# Altium PCB pcbEDMC.PcbDoc
Units mil, origin at the board's own origin, x right, y up, seen from the top; angles counter-clockwise.
Board outline 9233.65 x 5593.65 mil, 2 copper layers (Top Layer, Bottom Layer); 78 components, 77 nets, 327 pads, 0 vias.
Unrouted connection lines stored in the file: 3.
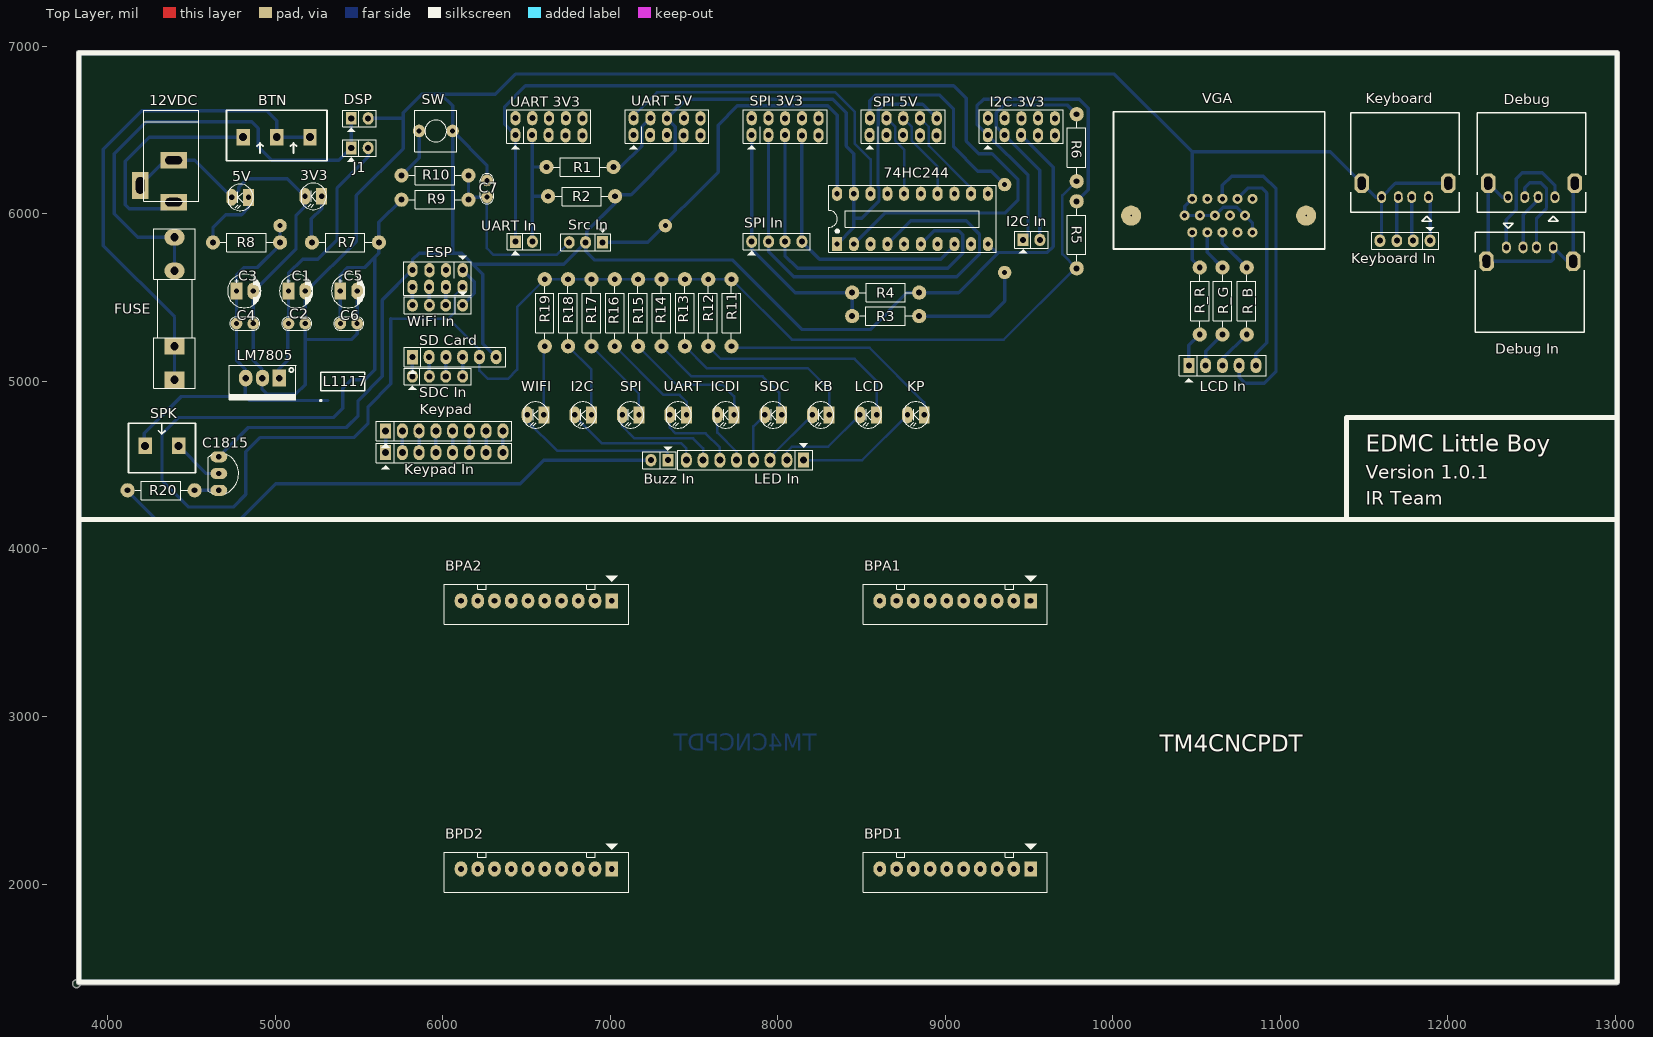
[diagram p0: Top Layer view]
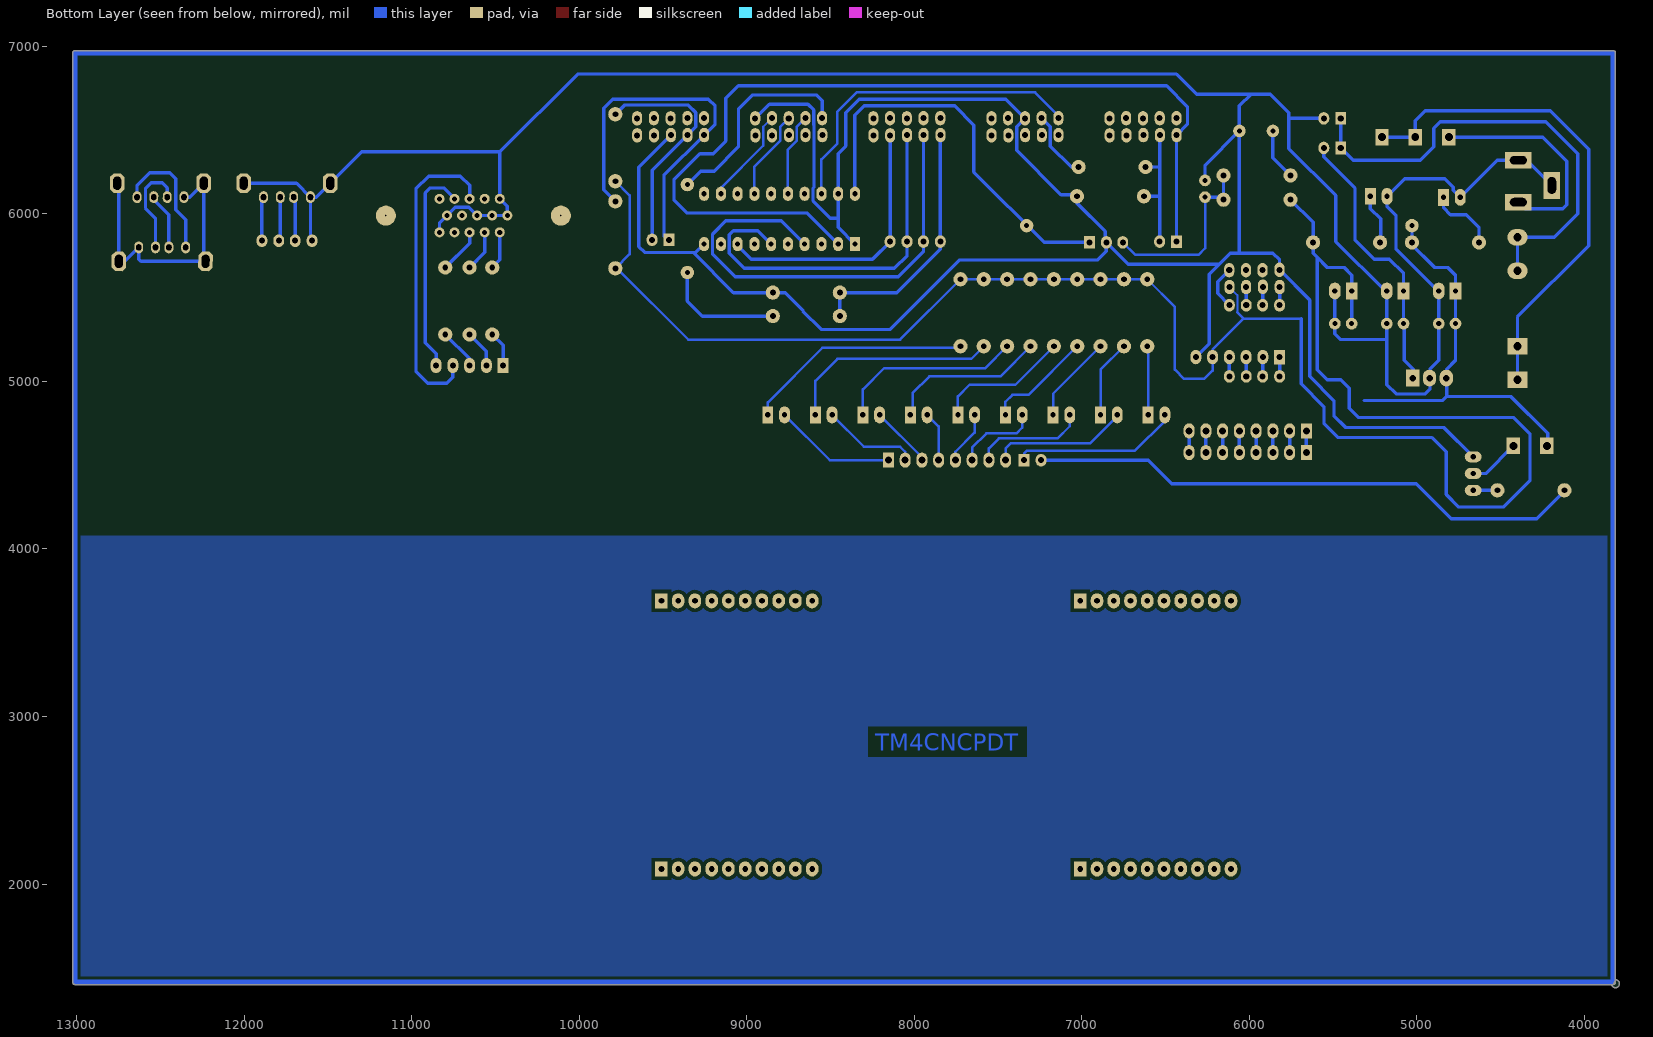
[diagram p1: Bottom Layer view, seen from below]
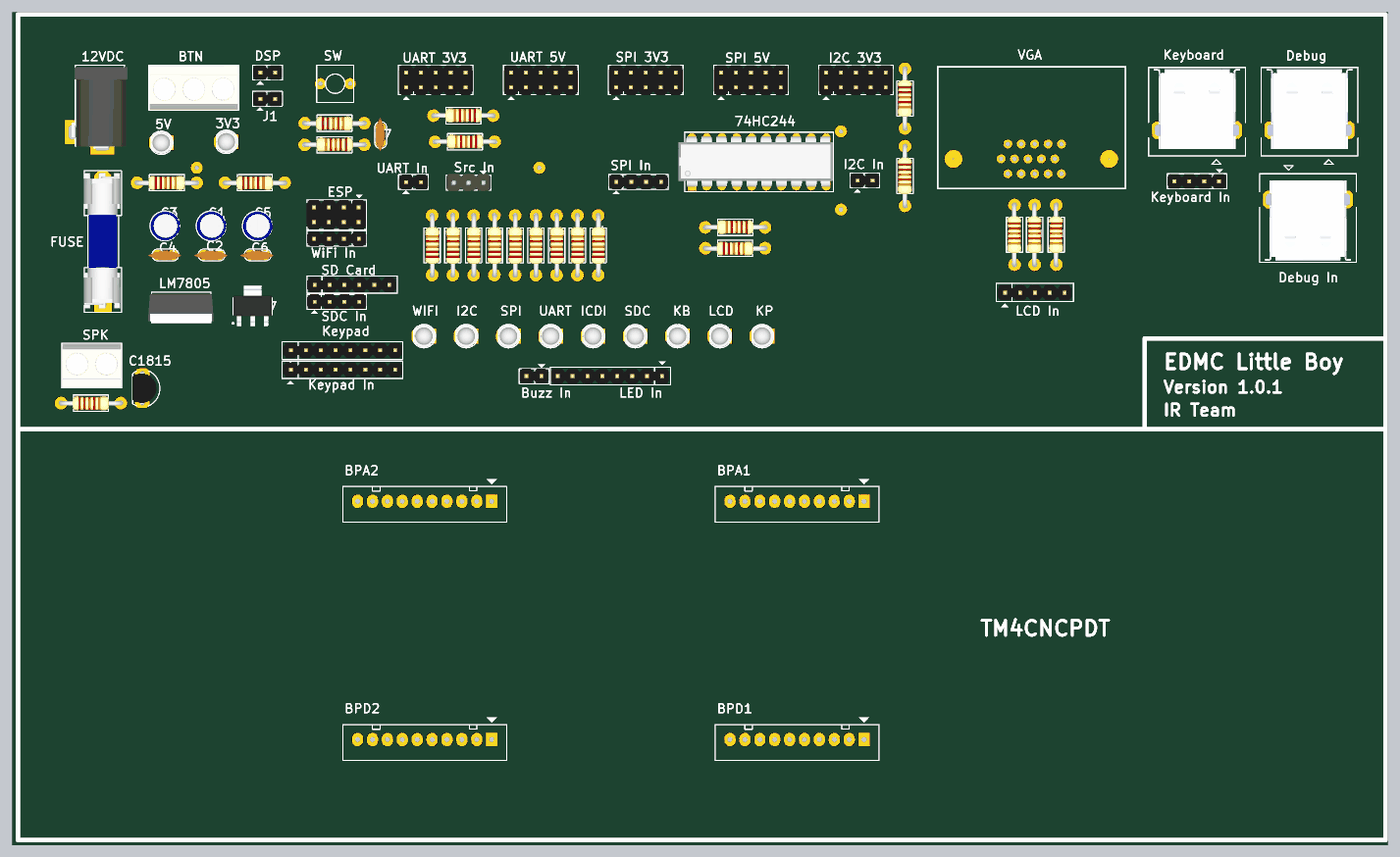
[diagram p2: 3D render of the assembled board from above, using the file's embedded part models]

## Layer stack, top to bottom
Top Solder: solder mask 0.4, Solder Resist, Dk 3.5
Top Layer: signal copper 1.4
Dielectric 1: dielectric 12.6, FR-4, Dk 4.8
Bottom Layer: signal copper 1.4
Bottom Solder: solder mask 0.4, Solder Resist, Dk 3.5

## Board outline
3791.36,1405 ccw(c3815,1405) 3815,1381.36 ccw(c3815,1405) 3838.1,1399.98 13010,1399.98 ccw(c13010,1415) 13025.01,1415 13025.01,6960 ccw(c13010,6960) 13010,6975.02 3830,6975.02 ccw(c3830,6960) 3814.99,6960 3814.99,1415 ccw(c3830,1415) 3830,1399.98 3814.99,1428.64 ccw(c3815,1405)

## Design rules (kind name [scope] priority, off if disabled: settings)
Clearance [All] p1: gap=10
PolygonConnect [All] p1: connectstyle=Relief reliefconductorwidth=10 reliefentries=4 polygonreliefangle="90 Angle" airgapwidth=10
RoutingVias [All] p1: holewidth=28 width=50 viastyle="Through Hole" minholewidth=28 minwidth=50 maxholewidth=28 maxwidth=50
SolderMaskExpansion [All] p1: expansion=4
Width [All] p1: maxlimit=22 minlimit=15 preferedwidth=20
30 further rules are at their usual default settings.

## Components (designator, comment, footprint, x,y, rotation, side; value= is the part's Value field where it differs from the comment)
3V3 "LED" LED-3mm 5278.5,6105 r180 top
5V "LED" LED-3mm 4841.5,6098.59 r180 top
12VDC "Jack DC" DC-IN 4295,6195 r270 top
74HC244 "74HC244" DIP20/W0.3 8355,5820 r0 top
BPA1 "JP10" Header10 9510,3690 r180 top (schematic designator KIT1)
BPA2 "JP10" Header10 7010,3690 r180 top (schematic designator KIT3)
BPD1 "JP10" Header10 9510,2090 r180 top (schematic designator KIT2)
BPD2 "JP10" Header10 7010,2090 r180 top (schematic designator KIT4)
BTN "" "DOMINO 3-5mm" 4810,6458.5 r0 top
"Buzz In" "Header 2" JP2 7345,4530 r180 top
C1 "Cap Pol" CP1/2 5080,5540 r0 top
C2 "Cap Non-Pol" CN1 5180,5345 r180 top
C3 "Cap Pol" CP1/2 4770,5540 r0 top
C4 "Cap Non-Pol" CN1 4870,5345 r180 top
C5 "Cap Pol" CP1/2 5390,5540 r0 top
C6 "Cap Non-Pol" CN1 5490,5345 r180 top
C7 "Cap Non-Pol" CN1 6265,6100 r90 top
C1815 "C1815" QTO-92 4665,4450 r270 top
Debug "8492121" USB-C1 12505,6270 r0 top
"Debug In" "8492121" USB-C1 12485,5630 r180 top
DSP "Header 2" JP2 5455,6570 r0 top
ESP "Header 4X2" JP4x2 5970,5615 r180 top
FUSE "Fuse" FUSE 4400,5435 r90 top
I2C "LED" LED-3mm 6888.75,4800 r180 top
"I2C 3V3" "Header 5X2" JP5X2 9255,6470 r0 top
"I2C In" "Header 2" JP2 9465,5845 r0 top
ICDI "LED" LED-3mm 7740,4800 r180 top
J1 "Header 2" JP2 5455,6393.5 r0 top
KB "LED" LED-3mm 8307.5,4800 r180 top
Keyboard "8492121" USB-C1 11750,6270.06 r0 top
"Keyboard In" "Header 4" JP4 11795,5840 r180 top
Keypad "Header 8" JP8 5660,4705 r0 top (schematic designator KeyPad)
"Keypad In" "Header 8" JP8 5660,4575 r0 top
KP "LED" LED-3mm 8875,4800 r180 top
L1117 "LM1117" SOT223-4N 5405,5000 r90 top
LCD "LED" LED-3mm 8591.25,4800 r180 top
"LCD In" "Header 5" JP5 10455,5095 r0 top
"LED In" "Header 8" JP8 8155,4530 r180 top
LM7805 "LM7805" QTO-220 5025,5020 r180 top
R1 "RESISTOR" "RES 1/2W" 6620,6280 r0 top
R2 "RESISTOR" "RES 1/2W" 6630,6105 r0 top
R3 "RESISTOR" "RES 1/2W" 8845,5390 r180 top
R4 "RESISTOR" "RES 1/2W" 8445,5530 r0 top
R5 "RESISTOR" "RES 1/2W" 9785,5675 r90 top
R6 "RESISTOR" "RES 1/2W" 9785,6195 r90 top
R7 "RESISTOR" "RES 1/2W" 5620,5830 r180 top
R8 "RESISTOR" "RES 1/2W" 5030,5830 r180 top
R9 "RESISTOR" "RES 1/2W" 5755,6085 r0 top
R10 "RESISTOR" "RES 1/2W" 6155,6230 r180 top
R11 "RESISTOR" "RES 1/2W" 7725,5610 r270 top
R12 "RESISTOR" "RES 1/2W" 7585.62,5610 r270 top
R13 "RESISTOR" "RES 1/2W" 7446.25,5610 r270 top
R14 "RESISTOR" "RES 1/2W" 7306.88,5610 r270 top
R15 "RESISTOR" "RES 1/2W" 7167.5,5610 r270 top
R16 "RESISTOR" "RES 1/2W" 7028.12,5610 r270 top
R17 "RESISTOR" "RES 1/2W" 6888.75,5610 r270 top
R18 "RESISTOR" "RES 1/2W" 6749.38,5610 r270 top
R19 "RESISTOR" "RES 1/2W" 6610,5610 r270 top
R20 "RESISTOR" "RES 1/2W" 4520,4350 r180 top
R_B "RESISTOR" "RES 1/2W" 10800,5280 r90 top
R_G "RESISTOR" "RES 1/2W" 10655,5280 r90 top
R_R "RESISTOR" "RES 1/2W" 10520,5280 r90 top
"SD Card" "Header 6" JP6 5820,5145 r0 top (schematic designator "SD CARD")
SDC "LED" LED-3mm 8023.75,4800 r180 top
"SDC In" "Header 4" JP4 5920,5030 r0 top
SPI "LED" LED-3mm 7172.5,4800 r180 top
"SPI 3V3" "Header 5X2" JP5X2 7845,6470 r0 top
"SPI 5V" "Header 5X2" JP5X2 8550,6470 r0 top
"SPI In" "Header 4" JP4 7945,5835 r0 top
SPK "Domino 2" "DOMINO 2- 5mm" 4325,4615 r0 top
"Src In" "Header 3" JP3 6855,5830 r180 top
SW "Tact SW - 2Pin" SW2 5860,6495 r0 top
UART "LED" LED-3mm 7456.25,4800 r180 top
"UART 3V3" "Header 5X2" JP5X2 6435,6470 r0 top
"UART 5V" "Header 5X2" JP5X2 7140,6470 r0 top
"UART In" "Header 2" JP2 6435,5835 r0 top
WIFI "LED" LED-3mm 6605,4800 r180 top
"WiFi In" "Header 4" JP4 6020,5455 r180 top

## Footprints (in the part's own frame and the unit in brackets; to place one, negate y for a bottom-side part, rotate by r counter-clockwise, add the part's x,y. Pads: shape width x height; smd on the part's side, far side on the other; paste and mask are expansions set on the pad)
CN1 [mil]
  round 70 hole 31: 1(0,0) 2(100,0)
  silkscreen extent -40,-40 141,40, body extent -60,-30 170,37, height 265
CP1/2 [mil] "Tu hoa < 22uF/16>50V"
  rect 70x100 hole 32: 1(0,0)
  oval 70x100 hole 32: 2(100,0)
  silkscreen extent -53,-100 147,100, body extent -49,-99 149,99, height 287
DC-IN [mil] "Jac DC input"
  rect 100x160 hole 50 slot 100 at 90 deg: 1(125,100) 2(-125,100)
  rect 160x100 hole 50 slot 100 at 0 deg: 3(25,-100)
  silkscreen extent -425,-80 120,250, body extent -410,-105 134,269, height 434
DIP20/W0.3 [mil] "DIP 20, 20 PIN, W 300mil, Pin to pin 100mil"
  rect 60x85 hole 31: 1(0,0)
  oval 60x85 hole 31: 2(100,0) 3(200,0) 4(300,0) 5(400,0) 6(500,0) 7(600,0) 8(700,0) 9(800,0) 10(900,0) 11(900,300) 12(800,300) 13(700,300) 14(600,300) 15(500,300) 16(400,300) 17(300,300) 18(200,300) 19(100,300) 20(0,300)
  silkscreen extent -50,-50 950,350, body extent -91,-18 945,322, height 155
"DOMINO 2- 5mm" [mm]
  rect 2x2.5 hole 1.2: 1(-2.54,0) 2(2.54,0)
  silkscreen extent -5.08,-4.08 5.08,3.43, body extent -5,-4.07 5,3.43, height 10
"DOMINO 3-5mm" [mm]
  rect 2x2.5 hole 1.2: 1(0,0) 2(5.08,0) 3(10.147,0)
  silkscreen extent -2.54,-3.58 12.7,4.06, body extent -2.42,-3.51 12.58,3.99, height 10
FUSE [mil] "De Fuse"
  rect 100x120 hole 50: 1(-425,0) 1(-225,0)
  oval 100x120 hole 50: 2(225,0) 2(425,0)
  silkscreen extent -475,-125 475,125, body extent -448,-117 459,127, height 378
Header10 [mil] "CON10"
  rect 75x90 hole 34: 1(0,0)
  oval 75x90 hole 34: 2(100,0) 3(200,0) 4(300,0) 5(400,0) 6(500,0) 7(600,0) 8(700,0) 9(800,0) 10(900,0)
  silkscreen extent -100,-150 1000,140
JP2 [mil]
  rect 65x75 hole 36: 1(0,0)
  oval 65x75 hole 36: 2(101,0)
  silkscreen extent -50,-81 150,50, body extent -48,-50 148,48, height 323
JP3 [mil] "Jumper 3"
  rect 65x75 hole 36: 1(-100,0)
  oval 65x75 hole 36: 2(1,0) 3(99,0)
  silkscreen extent -150,-81 150,50, body extent -150,-60 150,55, height 355
JP4 [mil] "Jumper 4"
  oval 65x75 hole 36: 1(-100,0) 2(1,0) 3(99,0) 4(200,0)
  silkscreen extent -150,-81 250,50, body extent -148,-48 248,50, height 323
JP4x2 [mil] "Connector 4x2"
  oval 60x86 hole 36: 1(-150.5,-49.5) 2(-50.5,-49.5) 3(48.5,-49.5) 4(149.5,-51.5) 5(-149.5,51.5) 6(-49.5,51.5) 7(50,50) 8(150.5,51.5)
  silkscreen extent -200,-135 200,101, body extent -197,-100 203,100, height 335
JP5 [mil] "JP5"
  rect 65x90 hole 36: 1(0,0)
  oval 65x90 hole 36: 2(100,0) 3(200,0) 4(300,0) 5(400,0)
  silkscreen extent -57,-101 461,60, body extent -48,-53 448,45, height 323
JP5X2 [mil]
  oval 60x86 hole 36: 1(-0.5,0.5) 2(99.5,0.5) 3(198.5,0.5) 4(299.5,-1.5) 5(399.5,-1.5) 6(0.5,101.5) 7(100.5,101.5) 8(200,100) 9(300.5,101.5) 10(400,100)
  silkscreen extent -50,-85 450,150, body extent -50,-50 450,150, height 335
JP6 [mil] "JP6"
  rect 65x85 hole 36: 1(0,0)
  oval 65x85 hole 36: 2(100,0) 3(200,0) 4(300,0) 5(400,0) 6(500,0)
  silkscreen extent -50,-99 556,58, body extent -48,-50 548,48, height 323
JP8 [mil] "JP8"
  rect 65x90 hole 42: 1(0,0)
  oval 65x90 hole 42: 2(100,0) 3(200,0) 4(300,0) 5(400,0) 6(500,0) 7(600,0) 8(700,0)
  silkscreen extent -56,-100 752,57, body extent -48,-50 748,48, height 323
LED-3mm [mil] "LED 2 PIN, 3ly Only colour"
  rect 65x100 hole 32: 1(0,0)
  oval 65x100 hole 32: 2(100,0)
  silkscreen extent -29,-78 118,79, body extent -25,-75 113,75, height 217
QTO-92 [mil] "TO-92"
  oval 66x100 hole 32: 1(-100,0) 2(0,0) 3(100,0)
  silkscreen extent -117,-65 120,118, body extent -109,-66 109,95, height 245
QTO-220 [mil] "TO-220 - 1-2-3"
  rect 80x100 hole 39: 1(0,0)
  oval 80x100 hole 39: 2(100,0) 3(200,0)
  silkscreen extent -100,-76 300,130, body extent -119,-64 322,121, height 755
"RES 1/2W" [mil] "R 1/2W, 2 pin, 300mil"
  round 85 hole 35: 1(0,0) 2(400,0)
  silkscreen extent 42,-55 356,55, body extent -12,-45 414,49, height 91
SOT223-4N [mm] "SOT223, 4-Leads, Body 6.5x3.5mm, Pitch 2.3mm, Lead Span 7mm, IPC Medium Density"
  rect 2.4x1 on Bottom Overlay: 1(-2.9,2.3) 2(-2.9,0) 3(-2.9,-2.3)
  rect 2.4x3.3 on Bottom Overlay: 4(2.9,0)
  silkscreen extent -3.02,-3.35 1.4,3.47, body extent -3.39,-3.27 3.5,3.23, height 1.72
SW2 [mil] "SW button 2pin, 250x 250 mil"
  round 75 hole 31: 1(0,0) 2(200,0)
  silkscreen extent -25,-125 225,125
USB-C1 [mm] "THT, USB 2.0 A Connector, 4Pin, Body 15.8 x14.5mm"
  oval 1.35x1.8 hole 0.8 slot 0.9 at 90.92 deg rot 0.92: 1(3.429,-4.318) 2(0.889,-4.318) 3(-1.143,-4.318) 4(-3.683,-4.318)
  oct 2.2x3 hole 1.2 slot 2 at 90.92 deg rot 0.92: 4(-6.697,-2.206) 4(6.443,-2.206)
  silkscreen extent -8.38,-8 8.13,8.51, body extent -8.03,-5.46 7.77,8.24, height 6.97

## Part data
12VDC: "Jack DC input"
74HC244: library part 74HC245, "Octal bus tranceiver"
BPA1 BPA2 BPD1 BPD2: library part Header10, "Connector 10"
BTN: library part Hed3, "Header 3 (Green)"
"Buzz In" DSP "I2C In" J1 "UART In": "Header, 2-Pin"
C1 C3 C5: "Polarized Capacitor (Radial)"
C2 C4 C6 C7: "Capacitor"
C1815: "NPN Bipolar Transistor"
Debug "Debug In" Keyboard: library part USB-4, "THT USB 2.0 A Connector WE-EPLE"
ESP: "Header, 4-Pin, Dual row"
"I2C 3V3" "SPI 3V3" "SPI 5V" "UART 3V3" "UART 5V": "Header, 5-Pin, Dual row"
"Keyboard In" "SDC In" "SPI In" "WiFi In": "Header, 4-Pin"
Keypad "Keypad In" "LED In": "Header, 8-Pin"
L1117: "Available in 1.8V, 2.5V, 2.85V, 3.3V, 5V, and  Adjustable Versions"
"LCD In": "Header, 5-Pin"
LM7805: "Positive Voltage Regulator"
R1 R2 R3 R4 R5 R6 R7 R8 R9 R10 R11 R12 R13 R14 R15 R16 R17 R18 R19 R20 R_B R_G R_R: "Resistor"
"SD Card": "Header, 6-Pin"
SPK: "Domino, 2-Pin"
"Src In": "Header, 3-Pin"
SW: "Switch button 2 pin"

## Free pads (board coordinates)
  round 60 hole 30: 1(10475,5890) 2(10565,5890) 3(10655,5890) 4(10745,5890) 5(10835,5890) 6(10430,5990) 7(10520,5990) 8(10610,5990) 9(10700,5990) 10(10790,5990) 11(10475,6090) 12(10565,6090) 13(10655,6090) 14(10745,6090) 15(10835,6090)
  round 120 hole 10: 7(11155,5990) 8(10110,5990)
  round 80 hole 30: 16(5030,5930) 17(7330,5930) 18(9355,5650) 18(9355,6175)

## Nets (pads, with @x,y where several pads share a name; then routed paths per layer and width w, separated by ;. In a path a pad name is that pad's centre, name@x,y a point inside that pad or via, vN(x,y) a via of type N, cw(c..) or ccw(c..) an arc to the next point about the centre after c; other vN are vias at no path point)
+3V3: "SD Card.5" C5.1 C6.2 ESP.5 R5.1 R6.1 R7.1 R9.1 R11.1 R12.1 R13.1 R14.1 R15.1 R16.1 R17.1 R18.1 R19.1 | length 11650.8
  Bottom Layer w12: 6071.5,5411.5 6071.5,5515.5 ESP.5
  Bottom Layer w15: 5690,5375 6035,5375 ; 6071.5,5411.5 6035,5375 ; R6.1 9700,6110 9700,5760 R5.1 9775,5675 9350,5250 8085,5250 R11.1 R12.1 R13.1 R14.1 R15.1 R16.1 R17.1 R18.1 R19.1 6445,5445 6445,5070 6390,5015 6270,5015 6220,5065 6220,5145 6220,5190 6035,5375
  Bottom Layer w20: C6.2 C5.1 5390,5635 5435,5680 5535,5680 5595,5740 ; 5690,5375 5690,4985 5555,4850 5555,4750 5470,4665 4910,4665 4825,4580 4825,4325 4750,4250 4485,4250 4325,4410 4325,4685 4425,4785 5350,4785 5405,4840 5405,4960 5455,5010 5535,5010 5595,5070 5595,5740 ; R9.1 5620,5950 R7.1 5620,5765 5595,5740
+5V: 74HC244.20 "Src In.1" C3.1 C4.2 LM7805.3 pad.16 pad.17 R8.1 SPK.1 | length 4860
  Bottom Layer w20: SPK.1 4220,4620 4220,4690 4440,4910 4822.53,4910 4822.53,5072.47 4770,5125 C4.2 C3.1 4770,5635 4815,5680 4895,5680 R8.1@5037.5,5822.5 ; 4822.53,4912.47 4849.17,4885.83 5314.45,4885.83 ; R8.1 pad.16 ; 6955,5830 7225,5830 7645,6250 7645,6530 7760,6645 8300,6645 8355,6590 74HC244.20
B: pad.3 R_B.2 | length 270.1
  Bottom Layer w20: pad.3 10655,5825 R_B.2
FUSE: DSP.1 FUSE.2 J1.1 | length 2838.3
  Bottom Layer w20: FUSE.2@4400,5660 4400,5860 4180,5860 4040,6000 4040,6360 4230,6550 4860,6550 4900,6510 4900,6400 4980,6320 5381.5,6320 J1.1 DSP.1
G: pad.2 R_G.2 | length 247.3
  Bottom Layer w20: pad.2 10565,5770 R_G.2
GND: 3V3.2 5V.2 12VDC.2 12VDC.3 74HC244.1 74HC244.10 74HC244.19 "I2C 3V3.3" "Keyboard In.4" "SD Card.6" "SPI 5V.10" "Src In.2" "UART 5V.8" C1.2 C2.1 C3.2 C4.1 C5.2 C6.1 C7.2 C1815.1 DSP.2 ESP.4 Keyboard.4 LM7805.2 pad.5 pad.6 pad.7@10520,5990 pad.8@10610,5990 pad.10 pad.11 R2.2 R4.2 SW.2 | length 26678.2
  Bottom Layer w20: 12VDC.3 4345,6320 12VDC.2 4520.09,6320 5V.2 4784,6141.09 4784,6158.95 4835.05,6210 5073.5,6210 3V3.2 5178.5,6043.5 5125,5990 5125,5790 4875,5540 C3.2 C4.1 4870,5125 4922.53,5072.47 4922.53,4952.47 4950,4925 5125,4925 5180,4980 5180,5250 ; C1815.1 4840,4725 5425,4725 5495.55,4795.55 5495.55,4885.83 5640,5030.28 5640,5486 ESP.4 5820.5,5725.5 5860,5765 6115,5765 6180,5700 ; C1.2@5180,5535 C2.1 5180,5250 ; C1.2 5190,5540 5485,5835 5485,6110 5765,6390 5765,6570 ; C5.2 C6.1 5490,5285 5455,5250 5180,5250 ; DSP.2 5765,6570 ; 5990,6715 6060,6645 SW.2 ; 6060,5770 SW.2 ; C7.2 6265,6290 SW.2 ; 6320,5145 6240,5225 6240,5640 6180,5700 ; 74HC244.1 8455,5920 74HC244.19 8455,6360 8410,6405 8410,6605 8330,6685 7455,6685 7340,6570 7390,6520 7390,6503.21 7389.5,6502.71 7389.5,6379.5 7125,6115 7040,6115 R2.2 7030,6065 6860,5895 6860,5836 6854,5830 ; 8460,5975 8503.21,5975 8605,6076.79 8605,6153.21 8599.5,6158.71 8599.5,6531.29 8600.5,6532.29 8600.5,6620.5 8635,6655 8865,6655 8950,6570 ; 74HC244.10 9305,5770 9320,5770 ; 9453.5,6470.5 9645,6279 9645,5805 9610,5770 9320,5770 ; pad.5 10835,5945 pad.10 10740,6040 10660,6040 10610,5990 10520,5990 pad.6 10430,6045 pad.11 10475,6370 ; 11595,5840 11605,5850 Keyboard.4@11605,6100.06 ; Keyboard.4@12003.66,6183.21 11688.15,6183.21 Keyboard.4@11605,6100.06 ; 5765,6570 5765,6605 5875,6715 6315,6715 6435,6835 10010,6835 10475,6370 ; 6180,5700 6724,5700 6854,5830 ; 6854,5830 6854,5776 6905,5725 7730,5725 8145,5310 8555,5310 8665,5420 8665,5425 8770,5530 R4.2 9080,5530 9320,5770 ; 10475,6370 11299.55,6370 11486.34,6183.21 11569.49,6100.06 Keyboard.4@11605,6100.06
Net3V3_1: 3V3.1 R7.2 | length 297.5
  Bottom Layer w20: R7.2@5217,5833 5217,5970 5278.5,6031.5 3V3.1
Net5V_1: 5V.1 R8.2 | length 418.1
  Bottom Layer w20: R8.2@4645,5830 4630,5845 4630,5920 4705,5995 4800,5995 4841.5,6036.5 5V.1
Net12VDC_1: 12VDC.1 BTN.1 | length 1341.4
  Bottom Layer w20: 12VDC.1 4355,6030 4130,6030 4105,6055 4105,6315 4248.5,6458.5 BTN.1
NetBTN_2: BTN.2 BTN.3 FUSE.1 | length 3002.2
  Bottom Layer w20: FUSE.1@4400,5010 4400,5210 4400,5385 3975,5810 3975,6385 4205,6615 4950,6615 5010,6555 BTN.2 BTN.3
NetC1_1: C1.1 C2.2 J1.2 LM7805.1 | length 1670.1
  Bottom Layer w20: LM7805.1@5022.53,4990 5022.53,5072.53 5075,5125 C2.2@5075,5345 ; C2.2 C1.1@5080,5535 ; C1.1 5080,5645 5165,5730 5255,5730 5370,5845 5370,6155 5556,6341 J1.2
NetC1815_2: C1815.2 SPK.2 | length 308.3
  Bottom Layer w20: SPK.2 4590,4450 C1815.2
NetC1815_3: C1815.3 R20.1 | length 145
  Bottom Layer w20: R20.1 C1815.3
NetDebug_1: "Debug In.1" Debug.1 | length 780.4
  Bottom Layer w20: 12350,5800 12350,5965 12410,6025 12410,6210 12445,6245 12565,6245 12640,6170 Debug.1
NetDebug_2: "Debug In.2" Debug.2 | length 337.3
  Bottom Layer w20: 12450,5800 12450,5995 12540,6085 Debug.2
NetDebug_3: "Debug In.3" Debug.3 | length 586.8
  Bottom Layer w20: Debug.3 12460,6155 12490,6185 12555,6185 12590,6150 12590,6035 12530,5975 12530,5800
NetDebug_4: "Debug In.4" Debug.4 | length 1721.2
  Bottom Layer w20: Debug.4@12360,6100 12324.49,6100 12241.34,6183.15 12241.34,5726.85 12231.34,5716.85 12616.85,5716.85 12630,5730 12630,5800 12713.15,5716.85 12748.66,5716.85 12748.66,6173.15 Debug.4@12758.66,6183.15
NetI2C_1: I2C.1 R18.2 | length 467.7
  Bottom Layer w15: R18.2 6888.75,5070.62 I2C.1
NetICDI_1: ICDI.1 R15.2 | length 806.8
  Bottom Layer w15: R15.2 7397.5,4980 7670,4980 7740,4910 ICDI.1
NetKB_1: KB.1 R13.2 | length 1120.4
  Bottom Layer w15: R13.2 7576.25,5080 8180,5080 8307.5,4952.5 KB.1
NetKP_1: KP.1 R11.2 | length 1363.8
  Bottom Layer w15: R11.2 7735,5200 8550,5200 8875,4875 KP.1
NetLCD_1: LCD.1 R12.2 | length 1294.8
  Bottom Layer w15: R12.2 7660.62,5135 8460,5135 8591.25,5003.75 LCD.1
NetR1_2: "UART 5V.7" R1.2 | length 409.2
  Bottom Layer w20: R1.2 7065,6280 7189.5,6404.5 7189.5,6504.71 7190,6505.21 7190,6521 7240.5,6571.5
NetR3_1: "SPI 5V.6" pad.18 R3.1 | length 1999.7
  Bottom Layer w20: 8550.5,6571.5 8550.5,6675.5 8585,6710 8965,6710 9050,6625 9050,6400 9195,6255 9275,6255 pad.18@9355,6175 ; R3.1 9265,5390 9355,5480 9355,5635 pad.18@9370,5650
NetR10_2: R10.2 SW.1 | length 308.5
  Bottom Layer w20: R10.2 5860,6335 SW.1
NetR14_2: R14.2 SDC.1 | length 954.8
  Bottom Layer w15: R14.2 7486.88,5030 7910,5030 8010,4930 8010,4813.75 SDC.1
NetR16_2: R16.2 UART.1 | length 644.1
  Bottom Layer w15: R16.2 7318.12,4920 7415,4920 7456.25,4878.75 UART.1
NetR17_2: R17.2 SPI.1 | length 527.5
  Bottom Layer w15: R17.2 7172.5,4926.25 SPI.1
NetR19_2: R19.2 WIFI.1 | length 405
  Bottom Layer w15: WIFI.1 R19.2@6605,5205
PA4: "WiFi In.4" ESP.8 | length 108
  Bottom Layer w20: 5820,5455 ESP.8@5820,5563
PA5: "WiFi In.1" ESP.1 | length 267.3
  Bottom Layer w20: 6120,5455 6190,5525 6190,5595 ESP.1
PA6: "UART 3V3.2" "UART In.2" R1.1 R2.1 | length 802
  Bottom Layer w20: 6536,5835 6536,6105 ; 6536,6469 6536,6105 ; 6546,6280 R1.1 ; R2.1 6536,6105
PA7: 74HC244.2 "UART 3V3.1" "UART In.1" | length 5539.1
  Bottom Layer w20: 6434.5,6470.5 6370,6535 6370,6640 6495,6765 9050,6765 9125,6690 9125,6435 9200,6360 9280,6360 9435,6205 9435,6085 9355,6005 8640,6005 74HC244.2 ; 6435,5835 6435,6470
PA7(5V): 74HC244.18 "UART 5V.6" | length 1968.3
  Bottom Layer w15: 7140.5,6571.5 7140.5,6585.5 7280,6725 8345,6725 8460,6610 8460,6420 8555,6325 74HC244.18
PB0: "LCD In.5" pad.14 | length 1271.3
  Bottom Layer w20: pad.14 10810,6155 10890,6155 10920,6125 10920,5230 10855,5165 10855,5095
PB1: "LCD In.4" pad.13 | length 1877.3
  Bottom Layer w20: pad.13 10655,6170 10710,6225 10900,6225 10975,6150 10975,5060 10905,4990 10790,4990 10755,5025 10755,5095
PB2: "LCD In.3" R_B.1 | length 245.1
  Bottom Layer w20: 10655,5095 10655,5135 R_B.1
PB3: "LCD In.2" R_G.1 | length 226.4
  Bottom Layer w20: 10555,5095 10555,5180 R_G.1
PB4: "LCD In.1" R_R.1 | length 211.9
  Bottom Layer w20: 10455,5095 10455,5215 R_R.1
PB5: "LED In.1" KP.2 | length 731.8
  Bottom Layer w15: 8155,4530 8505,4530 KP.2
PC2: "LED In.2" LCD.2 | length 577.4
  Bottom Layer w15: 8055,4530 8055,4580 8085,4610 8301.25,4610 LCD.2
PC4: "LED In.3" KB.2 | length 357.1
  Bottom Layer w15: 7955,4547.5 KB.2
PC5: "LED In.4" SDC.2 | length 298.5
  Bottom Layer w15: 7855,4530 7855,4731.25 SDC.2
PC6: "LED In.5" ICDI.2 | length 317.6
  Bottom Layer w15: ICDI.2 7640,4695 7755,4580 7755,4530
PC7: "LED In.6" UART.2 | length 499.2
  Bottom Layer w15: UART.2 7356.25,4723.75 7390,4690 7570,4690 7655,4605 7655,4530
PD0: "SD Card.4" "SDC In.4" | length 115
  Bottom Layer w20: 6120,5030 6120,5145
PD1: "SD Card.3" "SDC In.3" | length 114
  Bottom Layer w20: 6020,5031 6020,5145
PD2: "SD Card.1" "SDC In.1" | length 115
  Bottom Layer w20: 5820,5030 5820,5145
PD3: "SD Card.2" "SDC In.2" | length 114
  Bottom Layer w20: 5921,5030 5921,5144
PD6: "WiFi In.3" ESP.7 | length 109
  Bottom Layer w20: 5921,5455 ESP.7@5921,5564
PD7: "WiFi In.2" ESP.6 | length 108
  Bottom Layer w20: 6019,5455 ESP.6@6019,5563
PF0: "LED In.7" SPI.2 | length 674.9
  Bottom Layer w15: SPI.2 7072.5,4732.5 7145,4660 7495,4660 7555,4600 7555,4530
PF1: "LED In.8" I2C.2 | length 823.3
  Bottom Layer w15: I2C.2 6788.75,4792.75 6951.5,4630 7425,4630 7455,4600 7455,4530
PF2: "Buzz In.1" WIFI.2 | length 995.8
  Bottom Layer w15: WIFI.2 6505,4765 6685,4585 7330,4585 7345,4570 7345,4530
PF3: "Buzz In.2" R20.2 | length 3367.3
  Bottom Layer w20: R20.2@4120,4375 4120,4345 4285,4180 4795,4180 5005,4390 6465,4390 6605,4530 7244,4530
PG0: "I2C 3V3.2" "I2C In.2" R6.2 | length 1393.7
  Bottom Layer w20: 9565,5840 9565,6260 9354.5,6470.5 9305.5,6519.5 9305.5,6605.21 9350,6649.71 9350,6650 9730,6650 R6.2
PG1: "I2C 3V3.1" "I2C In.1" R5.2 | length 2225
  Bottom Layer w20: 9470,5845 9495,5870 9495,6230 9254.5,6470.5 9190,6535 9190,6645 9230,6685 9800,6685 9855,6630 9855,6145 R5.2
PK0: "Keypad In.8" Keypad.8 | length 130
  Bottom Layer w20: 6360,4575 Keypad.8
PK1: "Keypad In.7" Keypad.7 | length 130
  Bottom Layer w20: 6260,4575 Keypad.7
PK2: "Keypad In.6" Keypad.6 | length 130
  Bottom Layer w20: 6160,4575 Keypad.6
PK3: "Keypad In.5" Keypad.5 | length 130
  Bottom Layer w20: 6060,4575 Keypad.5
PK4: "Keypad In.4" Keypad.4 | length 130
  Bottom Layer w20: 5960,4575 Keypad.4
PK5: "Keypad In.3" Keypad.3 | length 130
  Bottom Layer w20: 5860,4575 Keypad.3
PK6: "Keypad In.2" Keypad.2 | length 130
  Bottom Layer w20: 5760,4575 Keypad.2
PK7: "Keypad In.1" Keypad.1 | length 130
  Bottom Layer w20: 5660,4575 Keypad.1
PQ0: 74HC244.8 "SPI 3V3.4" "SPI In.4" | length 1629.6
  Bottom Layer w20: 8145,6468 8145,5835 8250,5730 8975,5730 9055,5810 74HC244.8
PQ0(5V): 74HC244.12 "SPI 5V.9" | length 577.6
  Bottom Layer w15: 8850.5,6571.5 8902,6520 8902,6408 9155,6155 74HC244.12
PQ1: 74HC244.6 "SPI 3V3.3" "SPI In.3" | length 2252.3
  Bottom Layer w20: 8044,6470 8044,5835 8044,5751 8120,5675 9015,5675 9105,5765 9105,5875 9080,5900 8935,5900 74HC244.6
PQ1(5V): 74HC244.14 "SPI 5V.8" | length 534.9
  Bottom Layer w15: 8750,6570 8802,6518 8802,6435.82 8955,6282.82 74HC244.14
PQ2(5V): 74HC244.16 "SPI 5V.7" | length 494.8
  Bottom Layer w15: 8650.5,6571.5 8701,6521 8701,6437.82 8755,6383.82 74HC244.16
PQ2+PA3: 74HC244.4 "SPI 3V3.2" "SPI In.2" | length 2832.8
  Bottom Layer w20: 7946,6469 7946,5835 7946,5774 8095,5625 9070,5625 9205,5760 9205,5880 9125,5960 8795,5960 74HC244.4
PQ3+PA2: "SPI 3V3.1" "SPI In.1" R3.2 R4.1 | length 1527.7
  Bottom Layer w20: 7845,6470 7845,5835 7845,5790 8105,5530 R4.1 R3.2
R: pad.1 R_R.2 | length 228.6
  Bottom Layer w20: pad.1 10475,5725 R_R.2
RST: "Src In.3" C7.1 R9.2 R10.1 | length 1104.8
  Bottom Layer w15: C7.1 6265,5795 6305,5755 6681,5755 6756,5830
  Bottom Layer w20: R10.1 R9.2 6170,6100 C7.1
TP4: "Keyboard In.1" Keyboard.1 | length 264.2
  Bottom Layer w20: Keyboard.1 11895,6090.06 11895,5840
TP5: "Keyboard In.2" Keyboard.2 | length 263.8
  Bottom Layer w20: Keyboard.2 11785,5849 11794,5840
TP6: "Keyboard In.3" Keyboard.3 | length 263.8
  Bottom Layer w20: 11696,5840 11696,6091.06 Keyboard.3
pads on no net: 74HC244.3 74HC244.5 74HC244.7 74HC244.9 74HC244.11 74HC244.13 74HC244.15 74HC244.17 "I2C 3V3.4" "I2C 3V3.5" "I2C 3V3.6" "I2C 3V3.7" "I2C 3V3.8" "I2C 3V3.9" "I2C 3V3.10" "SPI 3V3.5" "SPI 3V3.6" "SPI 3V3.7" "SPI 3V3.8" "SPI 3V3.9" "SPI 3V3.10" "SPI 5V.1" "SPI 5V.2" "SPI 5V.3" "SPI 5V.4" "SPI 5V.5" "UART 3V3.3" "UART 3V3.4" "UART 3V3.5" "UART 3V3.6" "UART 3V3.7" "UART 3V3.8" "UART 3V3.9" "UART 3V3.10" "UART 5V.1" "UART 5V.2" "UART 5V.3" "UART 5V.4" "UART 5V.5" "UART 5V.9" "UART 5V.10" BPA1.1 BPA1.2 BPA1.3 BPA1.4 BPA1.5 BPA1.6 BPA1.7 BPA1.8 BPA1.9 BPA1.10 BPA2.1 BPA2.2 BPA2.3 BPA2.4 BPA2.5 BPA2.6 BPA2.7 BPA2.8 BPA2.9 BPA2.10 BPD1.1 BPD1.2 BPD1.3 BPD1.4 BPD1.5 BPD1.6 BPD1.7 BPD1.8 BPD1.9 BPD1.10 BPD2.1 BPD2.2 BPD2.3 BPD2.4 BPD2.5 BPD2.6 BPD2.7 BPD2.8 BPD2.9 BPD2.10 ESP.2 ESP.3 L1117.1 L1117.2 L1117.3 L1117.4
copper on no net: | length 29450
  Bottom Layer w30: 3830,1415 3830,6960 13010,6960 13010,1415 3830,1415

## Polygon pours and split planes (outlines as drawn)
no net on Bottom Layer "Bottom Layer-No Net" (solid, pour order 0): 3830,4075 3835,4080 13010,4080 13010,1415 3830,1415 3830,4080

## Other copper
Bottom Layer:
  text "TM4CNCPDT" at 8235,2795 h100

## Silkscreen, mask and mechanical layers (free items; w line width, h text height)
Top Overlay:
  lines w10: 11265,6609 10005,6609 10005,5790 11265,5790 11265,6610
  lines w30: 11395,4175 11395,4785 13010,4785 ; 3830,4175 3830,1415 13010,1415 13010,4175 ; 3830,4175 3830,6960 13010,6960 13010,4175 ; 3830,4175 13010,4175
  text "VGA" at 10535,6660 h60
  text "EDMC Little Boy" at 11510,4580 h100
  text "Version 1.0.1" at 11510,4420 h80
  text "IR Team" at 11510,4265 h80
  text "TM4CNCPDT" at 10280,2790 h100
Mechanical 1:
  lines w47.24: 3815,1405 3815,6970 13020,6970 13020,1405 3815,1405